# EAGLE board tracker (EAGLE 7.4.0)
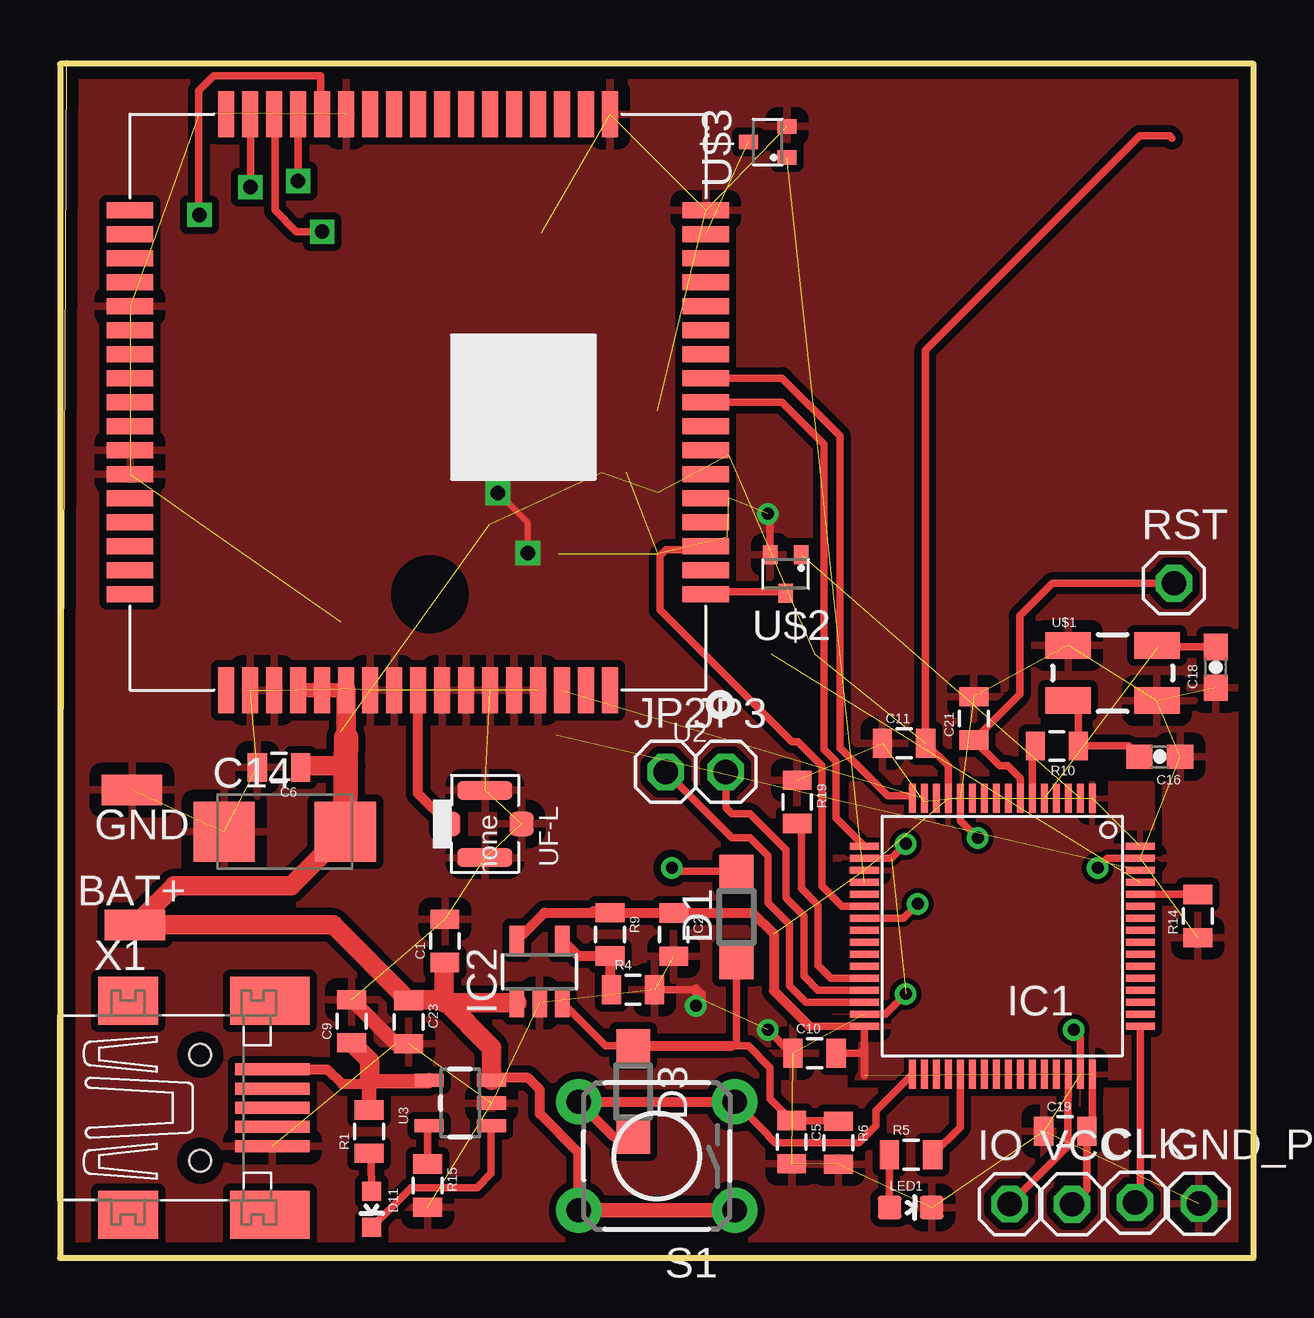
[diagram p0: board, top side]
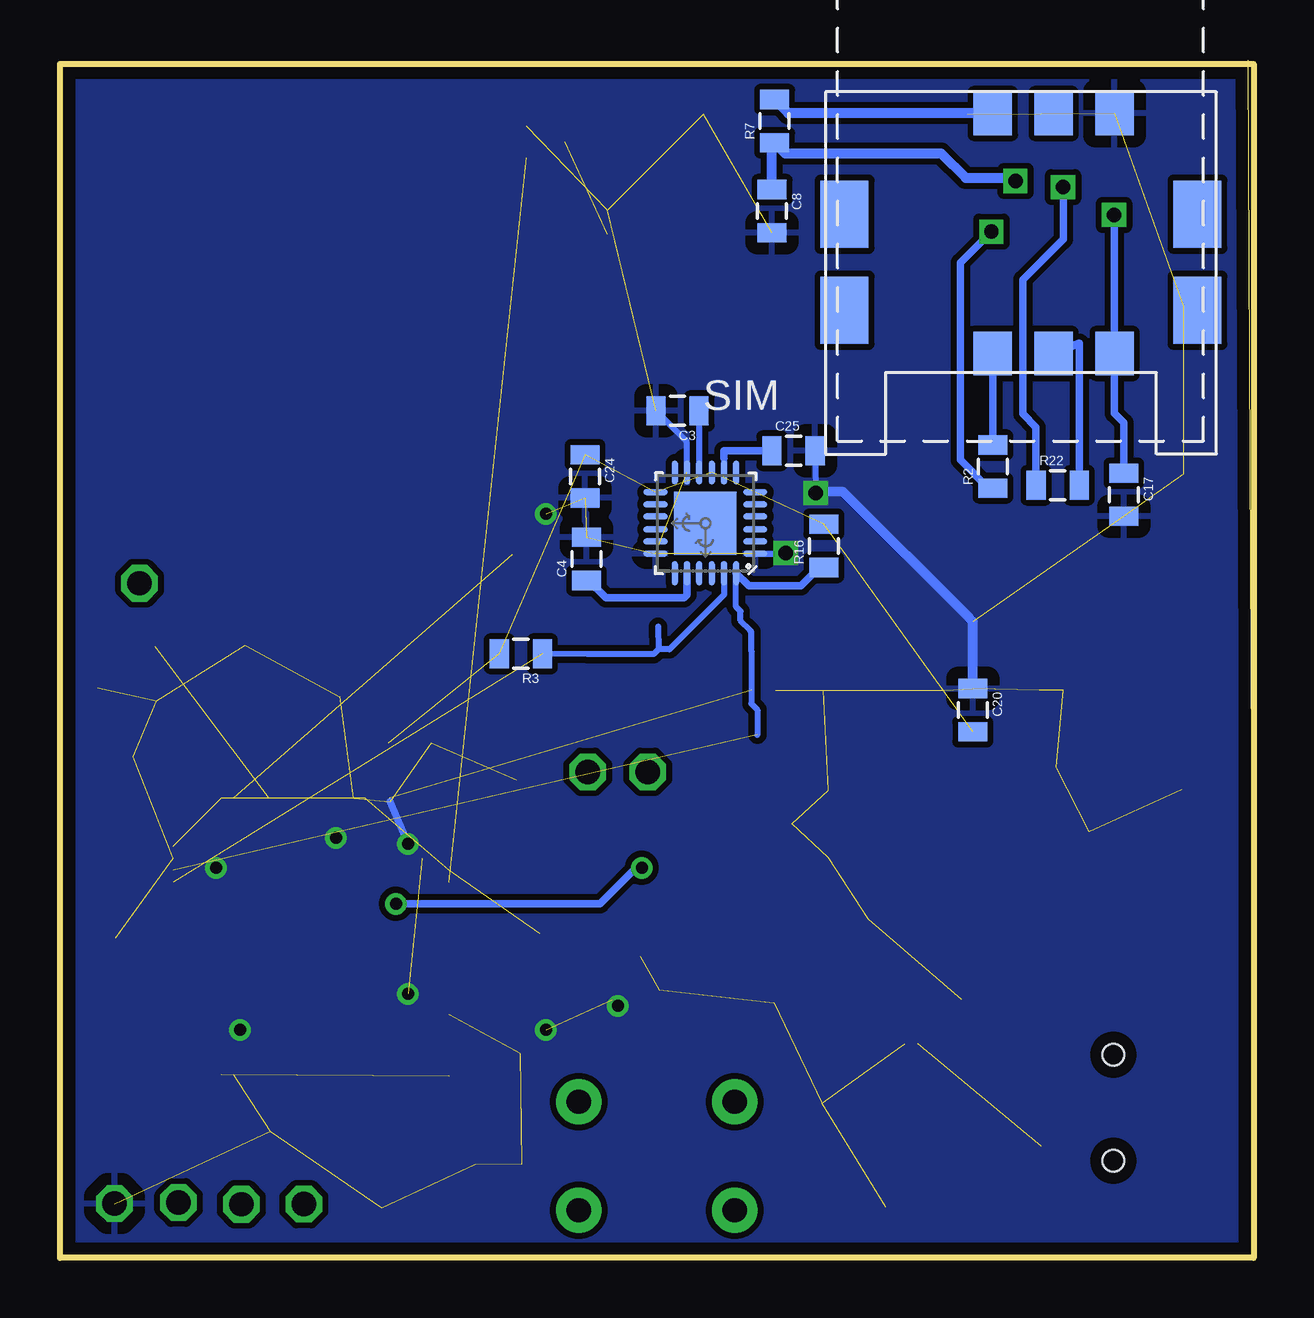
[diagram p1: board, bottom side, seen from below]

Size 49.75 x 49.91 mm. Coordinates in mm from the lower left corner, seen from the top.
Outline: 0.25,49.91 0,0
Outline: 0,0 49.75,0 49.75,49.75 0,49.75 0,0
Copper layers (1*16): Top 0.035mm / dielectric 1.2mm / Bottom 0.035mm
Design rules "default *": minimum track width 10mil, minimum drill 20mil, track to track 8mil, track to pad 8mil, pad to pad 8mil, via to via 8mil, smd to smd 8mil, copper to edge 20mil, drill to drill 10mil, minimum pad ring 10mil, minimum via ring 8mil, stop-mask expansion 4mil, vias tented up to drill 0mil, thermal gap 20mil
Net classes: 0 default: clearance 0.152 mm

## Footprints (pad centres in the part's own frame; a part is rotated, then mirrored left to right if it is on the bottom)
SMD1,27-2,54 = smd 1.27 x 2.54: 1 0,0
0805 = smd 0.8 x 1.2: 1 -0.9,0; 2 0.9,0
C/6032-28R = smd 2.55 x 2.5: + 2.525,0; - -2.525,0
0603-CAP = smd 1.1 x 1: 1 -0.85,0; 2 0.85,0
1X01 = drill 1.016 octagon: 1 0,0
SOD123 = smd 1.4 x 1.4: A 1.9,0; C -1.9,0
LED-0603 = smd 0.8 x 0.8: A 0,-0.75; C 0,0.75
LQFP64 = smd 0.3 x 1.2: 1 -3.75,-5.75; 2 -3.25,-5.75; 3 -2.75,-5.75; 4 -2.25,-5.75; 5 -1.75,-5.75; 6 -1.25,-5.75; 7 -0.75,-5.75; 8 -0.25,-5.75; 9 0.25,-5.75; 10 0.75,-5.75; 11 1.25,-5.75; 12 1.75,-5.75; 13 2.25,-5.75; 14 2.75,-5.75; 15 3.25,-5.75; 16 3.75,-5.75; 33 3.75,5.75; 34 3.25,5.75; 35 2.75,5.75; 36 2.25,5.75; 37 1.75,5.75; 38 1.25,5.75; 39 0.75,5.75; 40 0.25,5.75; 41 -0.25,5.75; 42 -0.75,5.75; 43 -1.25,5.75; 44 -1.75,5.75; 45 -2.25,5.75; 46 -2.75,5.75; 47 -3.25,5.75; 48 -3.75,5.75 | smd 1.2 x 0.3: 17 5.75,-3.75; 18 5.75,-3.25; 19 5.75,-2.75; 20 5.75,-2.25; 21 5.75,-1.75; 22 5.75,-1.25; 23 5.75,-0.75; 24 5.75,-0.25; 25 5.75,0.25; 26 5.75,0.75; 27 5.75,1.25; 28 5.75,1.75; 29 5.75,2.25; 30 5.75,2.75; 31 5.75,3.25; 32 5.75,3.75; 49 -5.75,3.75; 50 -5.75,3.25; 51 -5.75,2.75; 52 -5.75,2.25; 53 -5.75,1.75; 54 -5.75,1.25; 55 -5.75,0.75; 56 -5.75,0.25; 57 -5.75,-0.25; 58 -5.75,-0.75; 59 -5.75,-1.25; 60 -5.75,-1.75; 61 -5.75,-2.25; 62 -5.75,-2.75; 63 -5.75,-3.25; 64 -5.75,-3.75
SOT23 = smd 0.6 x 1.2: 1 -0.95,-1.306; 2 0,-1.306; 3 0.95,-1.306; 4 0.95,1.306; 5 -0.95,1.306
LED-0603' = smd 1 x 1: A 0,-0.877; C 0,0.877
TACTILE-PTH = drill 1.016 pad 1.88: 1 -3.251,2.261; 2 3.251,2.261; 3 -3.251,-2.261; 4 3.251,-2.261
693010010601 = smd 1.6 x 1.8: 1 0,11.6; 2 2.54,11.6; 3 5.08,11.6; 4 0,1.6; 5 2.54,1.6; 6 5.08,1.6 | smd 2 x 2.8: Z1 -3.45,9.8; Z2 -3.45,5.8; Z3 11.25,9.8; Z4 11.25,5.8
SIM900 = smd 1.93 x 0.66: 1 -12,8; 2 -12,7; 3 -12,6; 4 -12,5; 5 -12,4; 6 -12,3; 7 -12,2; 8 -12,1; 9 -12,0; 10 -12,-1; 11 -12,-2; 12 -12,-3; 13 -12,-4; 14 -12,-5; 15 -12,-6; 16 -12,-7; 17 -12,-8; 35 12,-8; 36 12,-7; 37 12,-6; 38 12,-5; 39 12,-4; 40 12,-3; 41 12,-2; 42 12,-1; 43 12,0; 44 12,1; 45 12,2; 46 12,3; 47 12,4; 48 12,5; 49 12,6; 50 12,7; 51 12,8 | smd 0.66 x 1.93: 18 -8,-12; 19 -7,-12; 20 -6,-12; 21 -5,-12; 22 -4,-12; 23 -3,-12; 24 -2,-12; 25 -1,-12; 26 0,-12; 27 1,-12; 28 2,-12; 29 3,-12; 30 4,-12; 31 5,-12; 32 6,-12; 33 7,-12; 34 8,-12; 52 8,12; 53 7,12; 54 6,12; 55 5,12; 56 4,12; 57 3,12; 58 2,12; 59 1,12; 60 0,12; 61 -1,12; 62 -2,12; 63 -3,12; 64 -4,12; 65 -5,12; 66 -6,12; 67 -7,12; 68 -8,12
SOT23-5 = smd 0.55 x 1.2: 1 -0.95,-1.3; 2 0,-1.3; 3 0.95,-1.3; 4 0.95,1.3; 5 -0.95,1.3
QFN-24-4MM2 = smd 1.016 x 0.254: 1 -2.066,1.257; 2 -2.066,0.75; 3 -2.066,0.247; 4 -2.066,-0.287; 5 -2.066,-0.792; 6 -2.066,-1.297; 13 2.086,-1.297; 14 2.086,-0.792; 15 2.086,-0.287; 16 2.086,0.247; 17 2.086,0.75; 18 2.086,1.257 | smd 0.254 x 1.016: 7 -1.267,-2.122; 8 -0.762,-2.122; 9 -0.258,-2.122; 10 0.278,-2.122; 11 0.78,-2.122; 12 1.287,-2.122; 19 1.287,2.082; 20 0.78,2.082; 21 0.278,2.082; 22 -0.258,2.082; 23 -0.762,2.082; 24 -1.267,2.082 | smd 2.616 x 2.616: P$1 0.02,-0.01
CRYSTAL-SMD-5X3 = smd 1.9 x 1.1: 1 -1.85,-1.15; 2 1.85,-1.15; 3 1.85,1.15; 4 -1.85,1.15
MMUN221X = smd 0.6 x 0.8: 1 -0.65,-0.8; 2 0.65,-0.8; 3 0,0.8
4P-U-FL = smd 1.016 x 1.016: D -1.524,0; GND3 1.524,0 | smd 2.286 x 0.762: GND1 0,1.397; GND2 0,-1.397
32005-301 = smd 3.1 x 0.5: 1 3,1.6; 2 3,0.8; 3 3,0; 4 3,-0.8; 5 3,-1.6 | smd 2.5 x 2: M1 -3,-4.45; M2 -3,4.45 | smd 3.3 x 2: M3 2.9,4.45; M4 2.9,-4.45 | hole 0.9: 0,2.2; 0,-2.2

## Placement (x,y rotation side)
BAT+  [SMD1,27-2,54]  3.12,13.88 270 top
C1  0.1u  [0805]  16.05,13.21 90 top
C2  0.1u  [0805]  25.58,13.47 270 top
C3  0.1u  [0805]  24.01,35.3 180 bottom
C4  2.2n  [0805]  27.8,29.13 90 bottom
C5  10n  [0805]  30.5,4.83 270 top
C6  1u  [0805]  9.12,20.44 180 top
C8  22p  [0805]  20.07,43.62 270 bottom
C9  4.7u  [0805]  12.15,9.87 90 top
C10  0.1u  [0805]  31.45,8.53 0 top
C11  0.1u  [0805]  35.18,21.45 0 top
C14  100u  [C/6032-28R]  9.37,17.76 0 top
C16  16p  [0603-CAP]  45.84,20.89 180 top
C17  0.1u  [0805]  5.41,31.8 270 bottom
C18  16p  [0603-CAP]  48.18,24.61 90 top
C19  0.1u  [0805]  41.9,5.28 0 top
C20  0.1u  [0805]  11.7,22.82 270 bottom
C21  0.1u  [0805]  38.09,22.48 90 top
C23  4.7u  [0805]  14.53,9.82 270 top
C24  0.1u  [0805]  27.86,32.57 270 bottom
C25  10n  [0805]  19.18,33.63 0 bottom
CLK  [1X01]  44.81,2.31 0 top
D1  MBR0520LT  [SOD123]  28.2,14.21 90 top
D3  MBR0520LT  [SOD123]  23.89,6.94 270 top
D11  GREEN  [LED-0603]  12.99,2.02 180 top
GND  [SMD1,27-2,54]  3,19.5 90 top
GND_PIN  [1X01]  47.47,2.27 0 top
IC1  STM32L152RBT  [LQFP64]  39.27,13.41 180 top
IC2  TPS73601  [SOT23]  20,11.93 0 top
IO  [1X01]  39.58,2.24 0 top
JP2  DBG_RX  [1X01]  25.25,20.25 0 top
JP3  DBG_TX  [1X01]  27.75,20.25 0 top
LED1  RED  [LED-0603']  35.46,2.1 270 top
R1  470  [0805]  12.88,5.27 90 top
R2  22  [0805]  10.86,32.98 90 bottom
R3  10k  [0805]  30.54,25.18 180 bottom
R4  30.9k  [0805]  23.89,11.18 0 top
R5  470  [0805]  35.47,4.3 0 top
R6  100K  [0805]  32.45,4.8 270 top
R7  22  [0805]  19.96,47.37 90 bottom
R9  46.4k  [0805]  22.93,13.48 270 top
R10  220  [0805]  41.55,21.33 180 top
R14  510  [0805]  47.42,14.25 90 top
R15  2K  [0805]  15.32,3.02 270 top
R16  10k  [0805]  17.91,29.67 90 bottom
R19  510  [0805]  30.73,19 270 top
R22  22  [0805]  8.16,32.2 0 bottom
RST  [1X01]  46.43,28.11 0 top
S1  PWR_ON  [TACTILE-PTH]  24.88,4.25 180 top
SIM  693010010601  [693010010601]  5.79,49.29 180 bottom
U2  SIM900  [SIM900]  14.92,35.66 180 top
U3  MCP73831  [SOT23-5]  16.68,6.46 90 top
U4  MPU-6050-1  [QFN-24-4MM2]  22.84,30.61 180 bottom
U$1  CRYSTAL-GROUNDED  [CRYSTAL-SMD-5X3]  43.88,24.38 0 top
U$2  MMUN221X  [MMUN221X]  30.25,28.5 180 top
U$3  MMUN221X  [MMUN221X]  29.5,46.5 90 top
UF-L  none  [4P-U-FL]  17.71,18.08 0 top
VCC  [1X01]  42.19,2.24 0 top
X1  MINI-USB-32005-301  [32005-301]  5.85,6.26 0 top

## Library data of the parts
BAT+ GND = wirepad
C1-C6 C8-C11 C16-C21 C23-C25 D11 R1-R7 R9 R10 R14-R16 R19 R22 U3 = SparkFun; OC_NEWARK: unknown
C14 = rcl; OC_NEWARK: unknown
CLK GND_PIN IO JP2 JP3 RST VCC = pinhead; OC_NEWARK: unknown
D1 D3 = diode; OC_NEWARK: unknown
IC1 = micro-stm_v2; OC_NEWARK: unknown
IC2 = tps73xx; OC_NEWARK: unknown
LED1 = SparkFun-LED; OC_NEWARK: unknown; PROD_ID: DIO-00819
S1 = SparkFun-Electromechanical; OC_NEWARK: unknown
SIM = Speicherkarten-SockelWR-CRD; OC_NEWARK: unknown
U2 = ICs_v54; OC_NEWARK: unknown
U4 = Testing; OC_NEWARK: unknown
U$1 = SparkFun-FreqCtrl; OC_NEWARK: unknown
U$2 U$3 = mmun221X
UF-L = Connector; OC_NEWARK: unknown
X1 = con-cypressindustries; OC_FARNELL: unknown; OC_NEWARK: unknown

## Nets
BOOT1: IC1.28 R19.2
GND: C1.2 C2.2 C3.2 C4.2 C5.2 C6.2 C8.2 C9.2 C10.1 C11.1 C14.- C16.1 C17.2 C18.1 C19.1 C20.1 C21.2 C23.2 C24.2 C25.2 GND.1 GND_PIN.1 IC1.12 IC1.18 IC1.31 IC1.47 IC1.63 IC2.2 LED1.C R4.2 R6.2 R14.1 R15.2 R19.1 SIM.4 U2.17 U2.18 U2.29 U2.39 U2.45 U2.46 U2.53 U2.54 U2.58 U2.59 U2.61 U2.62 U2.63 U2.64 U2.65 U3.2 U4.1 U4.11 U4.18 U$1.2 U$1.4 U$2.2 U$3.2 UF-L.GND1 UF-L.GND2 UF-L.GND3 X1.5
GPS_RX: IC1.42
GPS_TX: IC1.43
GSM_DTR: IC1.22 U2.3
GSM_RST: IC1.20 U$3.1
GSM_RXD: IC1.16 U2.10
GSM_STATUS: IC1.15 U2.66
GSM_TXD: IC1.17 U2.9
GSM_VBAT: BAT+.1 C1.1 C6.1 C14.+ C23.1 IC2.1 S1.1 S1.2 U2.55 U2.56 U2.57 U3.3
MCU_PWR_EN: D1.A IC1.23
N$1: U2.60 UF-L.D
N$2: R7.2 SIM.6
N$3: U2.16 U$3.3
N$5: R2.2 SIM.3
N$6: R22.2 SIM.2
N$7: IC1.37 R5.2
N$8: C18.2 IC1.5 U$1.3
N$9: C16.2 R10.1 U$1.1
N$12: D11.A R1.1
N$13: IC2.4 R4.1 R9.2
N$14: IC1.29 JP3.1
N$15: IC1.6 R10.2
N$16: IC1.60 R14.2
N$17: IC1.30 JP2.1
N$18: U2.1 U$2.3
N$27: LED1.A R5.1
N$29: C4.1 U4.20
N$30: C3.1 U4.10
NRST: C21.1 IC1.7 RST.1
PROG: R15.1 U3.5
PWR_GSM: IC1.2 U$2.1
PWR_OFF: D3.A IC1.33 S1.3 S1.4
SCL_IMU: IC1.61 R3.1 U4.23
SDA_IMU: IC1.62 R16.1 U4.24
SIM_CLK: R2.1 U2.32
SIM_DATA: C8.1 R7.1 U2.31
SIM_RST: R22.1 U2.33
SIM_VDD: C17.1 SIM.1 U2.30
STAT: D11.C U3.1
SWDCLK: CLK.1 IC1.49
SWDIO: IC1.46 IO.1
V+: C2.1 C10.2 C11.2 C19.2 C20.2 C24.1 IC1.1 IC1.13 IC1.19 IC1.32 IC1.48 IC1.64 IC2.5 R3.2 R9.1 R16.2 U4.9 U4.13 VCC.1
VCC_GSM: C5.1 D1.C D3.C IC2.3 R6.1
VIN1: C9.1 R1.2 U3.4 X1.1
VIO: C25.1 U4.8

## Tracks (layer width: path | path; a pad name or v marks a point on that pad's centre or on a via)
BOOT1
  Top 0.305: IC1.28 32.14,11.66 31.6,12.2 31.6,14.7 30.9,15.4 30.9,17.93 R19.2
GND  (via drill 0.5, 0.5 pad 0.3, 0.6)  (57 unrouted)
  Top 0.254: v19.5,29.38 19.5,30.62 v18.25,31.88
  Top 0.305: 37.5,19.16 IC1.12 37.52,18.23 v38.25,17.5 | IC1.18 34.66,16.66 v35.25,17.25 | IC1.31 34.41,10.16 v35.25,11 | IC1.47 42.52,9.22 v42.25,9.5 | IC1.63 43.66,16.66 v43.25,16.25 | U$2.2 29.6,30.9 v29.5,31 | C10.1 30.48,8.53 v29.5,9.5 | R4.2 26.57,11.18 26.75,11 26.75,10.75 v26.5,10.5 26.5,11.25 26.43,11.18 R4.2
  Top 0.406: 19.52,29.35 v19.5,29.38
  Top 0.61: C23.2 13.99,8.93 C9.2
  Bottom 0.254: U4.11 23.61,34 C3.2 | U4.1 19.5,29.35 v19.5,29.38 | v18.25,31.88 18.25,33.96 C25.2 | 11.7,26.52 11.83,26.64
  Bottom 0.305: v35.25,17.25 36,19
  Bottom 0.406: 11.83,26.64 17.11,31.92 18.2,31.92 v18.25,31.88 | C20.1 11.7,26.52
  pour Top (isolate 0.305, rank 3): 0.25,49.88 50.12,50.12 50.12,-0.12 0.25,-0.12
  pour Bottom (isolate 0.254): -0.12,0 50.38,0 50.25,50.12 0,50
GSM_DTR
  Top 0.305: IC1.22 32.59,14.66 31.75,15.5 31.75,20.5 30.75,21.5 30.5,21.5 25,27 25,29.25 25.25,29.5 26.77,29.5 U2.3
GSM_RST  (1 unrouted)
GSM_RXD
  Top 0.305: U2.10 30.09,36.66 32.5,34.25 32.5,21.25 34.5,19.25 35.43,19.25 IC1.16
GSM_STATUS  (1 unrouted)
GSM_TXD
  Top 0.305: U2.9 30.09,35.66 31.85,33.9 31.85,21.2 32.35,20.7 32.35,18.33 IC1.17
GSM_VBAT
  Top 0.406: S1.2 21.62,4.38 20,6 20,7 19.5,7.5 18.08,7.5 U3.3
  Top 0.61: S1.1 S1.2 | U2.57 U2.56 U2.55 | 11.91,20.94 11.92,21.68
  Top 0.813: 11.89,18.31 C14.+ 9.63,15.5 4.75,15.5 BAT+.1 11.38,13.88 C23.1 14.55,10.75 16,10.75 | U3.3 17.98,8.77 16,10.75 | IC2.1 16,10.62 16,10.75 | C1.1 16,12.31 16,10.75 | 11.92,21.68 U2.57 | C6.1 10.21,20.5 11.91,20.5
  Top 1.016: C14.+ 11.91,20.5 11.92,21.68
MCU_PWR_EN  (via drill 0.5)
  Top 0.305: IC1.23 35.16,14.16 v35.75,14.75 | D1.A 25.64,16.11 v25.5,16.25
  Bottom 0.305: v35.75,14.75 27.25,14.75 25.75,16.25 v25.5,16.25
N$1
  Top 0.406: UF-L.D 14.92,19.35 U2.60
N$2
  Bottom 0.406: SIM.6 19.39,47.69 R7.2
N$3  (1 unrouted)
N$5
  Bottom 0.305: R2.2 SIM.3
N$6
  Bottom 0.305: R22.2 7.26,38.12 SIM.2
N$7
  Top 0.305: R5.2 37.52,5.45 IC1.37
N$8  (1 unrouted)
  Top 0.305: U$1.3 45.79,25.46 C18.2
N$9
  Top 0.305: U$1.1 42.45,22.8 R10.1 44.54,21.33 C16.2
N$12
  Top 0.305: R1.1 12.97,4.08 D11.A
N$13
  Top 0.406: 22.9,12.55 R9.2 | R9.2 22.93,11.23 R4.1 | IC2.4 21.6,12.59 R9.2
N$14
  Top 0.305: IC1.29 31.59,11.16 31,11.75 31,14.25 30.25,15 30.25,17 28.75,18.5 28,18.5 27.75,18.75 JP3.1
N$15
  Top 0.305: R10.2 40.52,21.21 IC1.6
N$16
  Top 0.305: IC1.60 47.52,15.16 R14.2
N$17
  Top 0.305: JP2.1 28,17.5 28.75,17.5 29.5,16.75 29.5,14.8 30.4,13.9 30.4,11.35 31.09,10.66 IC1.30
N$18
  Top 0.305: U2.1 27,27.75 30.2,27.75 U$2.3
N$27
  Top 0.305: LED1.A 34.57,2.11 R5.1
N$29
  Bottom 0.305: C4.1 27.73,28.23 27,27.5 23.75,27.5 23.62,27.62 23.62,28.52 U4.20
N$30
  Bottom 0.254: C3.1 23.11,34.46 U4.10
NRST
  Top 0.305: RST.1 41.36,28.11 40,26.75 40,23.49 C21.1 39.17,20.5 39.5,20.5 40,20 40.02,19.97 IC1.7
PROG
  Top 0.305: R15.1 15.31,5.58 U3.5
PWR_GSM  (1 unrouted)
PWR_OFF
  Top 0.305: S1.3 29.5,5.14 29.5,5.1 29.8,4.8 33.3,4.8 34,5.5 34,6.13 IC1.33
  Top 0.406: S1.3 S1.4 23.1,5.04 D3.A
SCL_IMU  (1 unrouted)
  Bottom 0.254: R3.1 27.76,25.16 25,25.16 24.81,25.36 | 24.82,26.31 24.81,25.36 | U4.23 22.07,27.64 24.35,25.36 24.81,25.36
SDA_IMU  (1 unrouted)
  Bottom 0.254: 20.68,21.8 20.68,22.84 20.93,23.09 20.93,25.3 20.93,26.08 20.98,26.13 20.98,26.15 21.38,26.55 21.38,26.94 21.57,27.13 U4.24
  Bottom 0.305: 18.11,28.77 18.88,28 21.04,28 U4.24
  Bottom 0.406: R16.1 18.11,28.77
SIM_CLK  (via drill 0.6)
  Top 0.305: v10.93,42.76 9.85,42.76 8.96,43.65 8.96,47.61 U2.32
  Bottom 0.305: v10.93,42.76 12.22,41.47 12.22,33.25 11.05,32.08
  Bottom 0.406: R2.1 11.05,32.08
SIM_DATA  (via drill 0.6)
  Top 0.305: U2.31 v9.92,44.88 v9.92,44.87
  Bottom 0.406: v9.92,44.87 10.05,45 12,45 13.02,46.02 19.51,46.02 R7.1 20.07,46.36 C8.1
SIM_RST  (via drill 0.6)
  Top 0.305: v7.94,44.62 7.94,47.64 U2.33
  Bottom 0.305: v7.94,44.62 v7.93,44.61 7.93,42.44 7.99,42.38 8,42.38 9.62,40.76 9.62,35.17 9.06,34.61 R22.1
SIM_VDD  (via drill 0.6)
  Top 0.305: U2.30 10.87,47.7 10.87,49.26 6.42,49.26 5.79,48.63 5.79,43.49 v5.81,43.46
  Bottom 0.305: v5.81,43.46 5.81,37.71 SIM.1 5.79,35.2 5.4,34.8 C17.1
STAT
  Top 0.305: U3.1 17.98,5.5 17.98,3.52 17.38,2.92 14.64,2.92 D11.C
SWDCLK
  Top 0.305: CLK.1 45.02,2.53 IC1.49
SWDIO
  Top 0.305: IO.1 42,4.66 42,6.71 42.02,6.73 IC1.46
V+  (11 unrouted)
  Top 0.305: IC1.13 37.02,20.5 C11.2 36.08,37.83 45,46.75 46.25,46.75 46.35,46.65 | VCC.1 42.8,2.85 C19.2 43.02,5.6 43.02,6.88 43.04,6.89 43.04,7.64 IC1.48 | 33.52,7.6 33.52,8.7 | 33.52,8.7 IC1.32 31.24,9.66 | C10.2 33.35,8.53 33.52,8.7
  Top 0.406: R9.1 22.25,14.46 | R9.1 C2.1 | C2.1 | IC2.5 20.19,14.38 R9.1 | C2.1 28.86,14.38 29.75,13.5 29.75,11.14 31.24,9.66
  pour Top: 33,19.75 45.5,19.75 45.5,7.5 33,7.5
VCC_GSM
  Top 0.305: D3.C 22.73,8.84 IC2.3 | 27.98,8.84 28.25,8.84 | 28.25,8.84 28.69,8.84 29.6,7.92 29.6,6.62 C5.1 32.42,5.72 R6.1 | D1.C 28.2,8.89 28.25,8.84
  Top 0.406: D3.C 27.98,8.84
VIN1
  Top 0.406: X1.1 11.14,7.86 11.75,7.25 12.64,7.25 12.75,7.36
  Top 0.61: 13,7.36 12.75,7.36 12.88,7.23 R1.2 | 13,7.36 15.34,7.36 U3.4 | 12.9,7.46 13,7.36
  Top 0.813: 12.9,7.46 12.9,8.21 C9.1
VIO
  Bottom 0.254: 22.07,33.32 U4.8
  Bottom 0.305: C25.1 22.07,33.63 22.07,33.32